# Altium PCB dtb-218-AW1.PcbDoc
Units mil, origin at the board's own origin, x right, y up, seen from the top; angles counter-clockwise.
Board outline 1240 x 3940 mil, 4 copper layers (Top Layer, GND Plane, 3.3V Plane, Bottom Layer), stack 61.2 mil thick; 21 components, 32 nets, 133 pads, 37 vias.
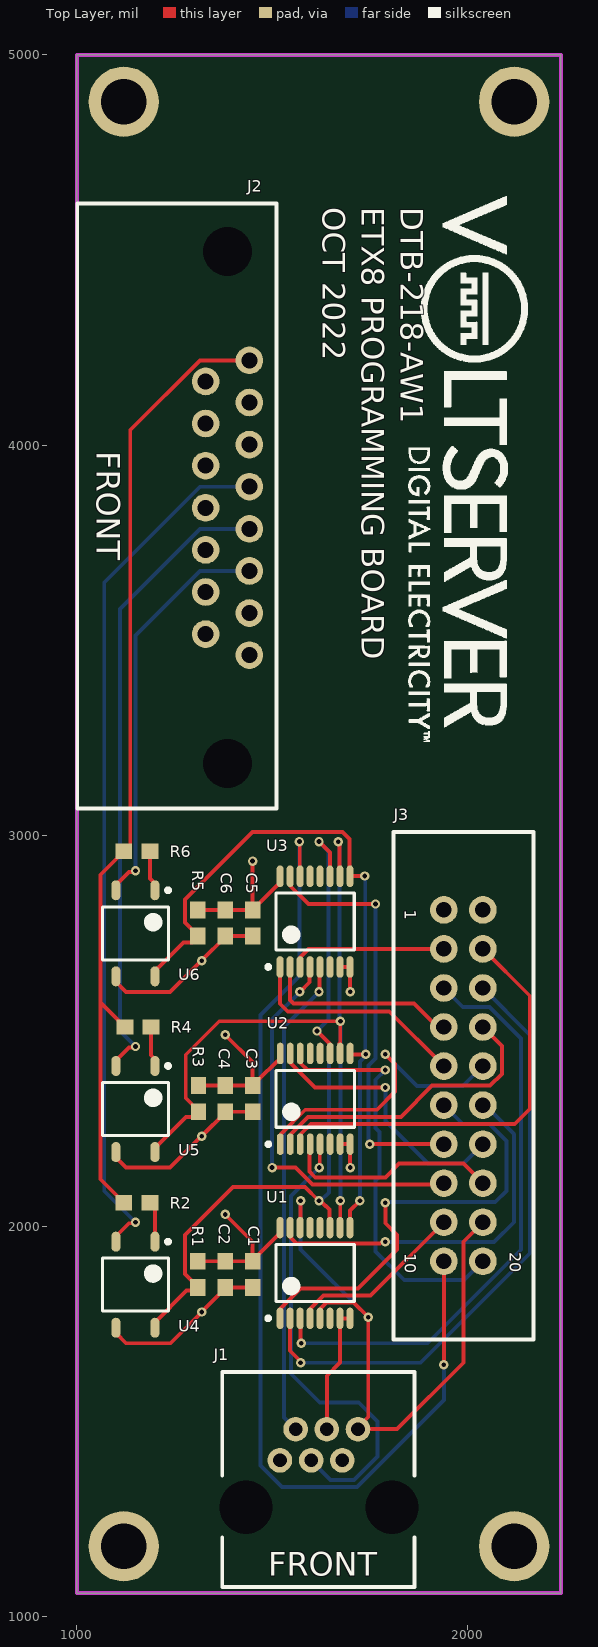
[diagram p0: Top Layer view]
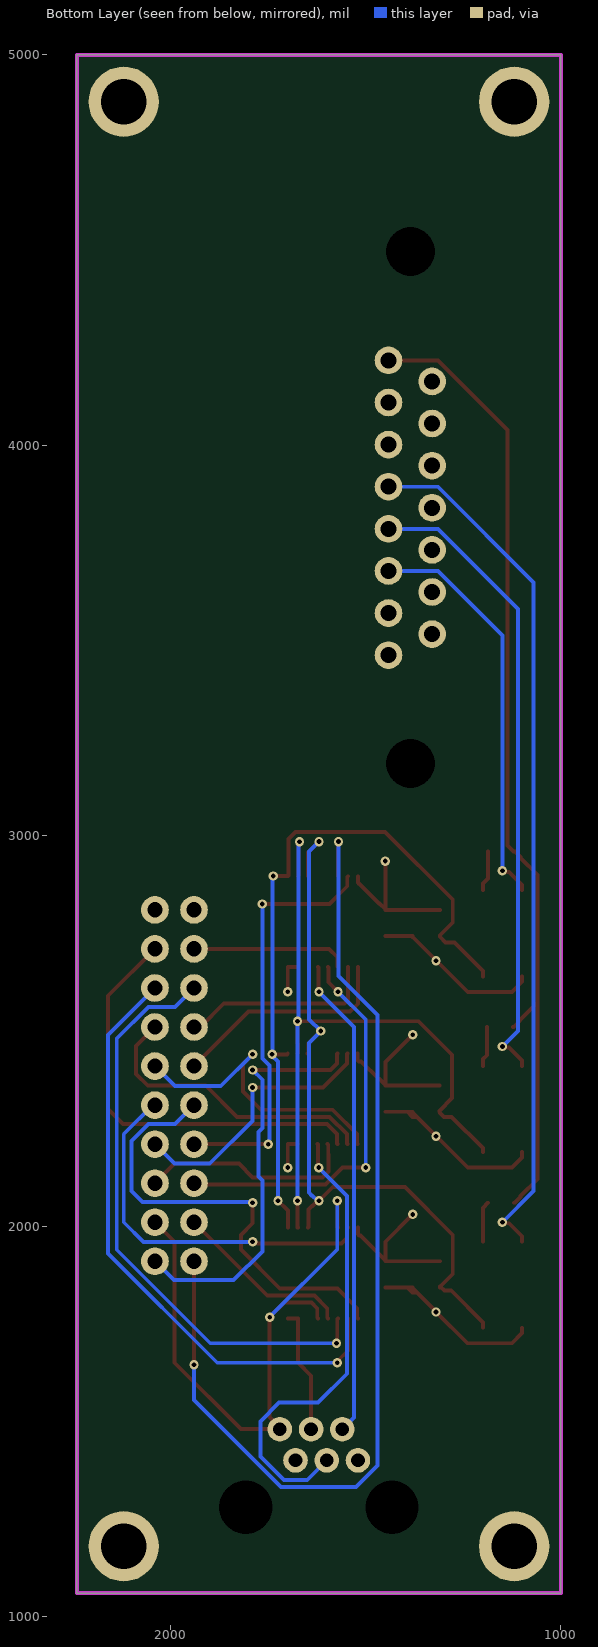
[diagram p1: Bottom Layer view, seen from below]
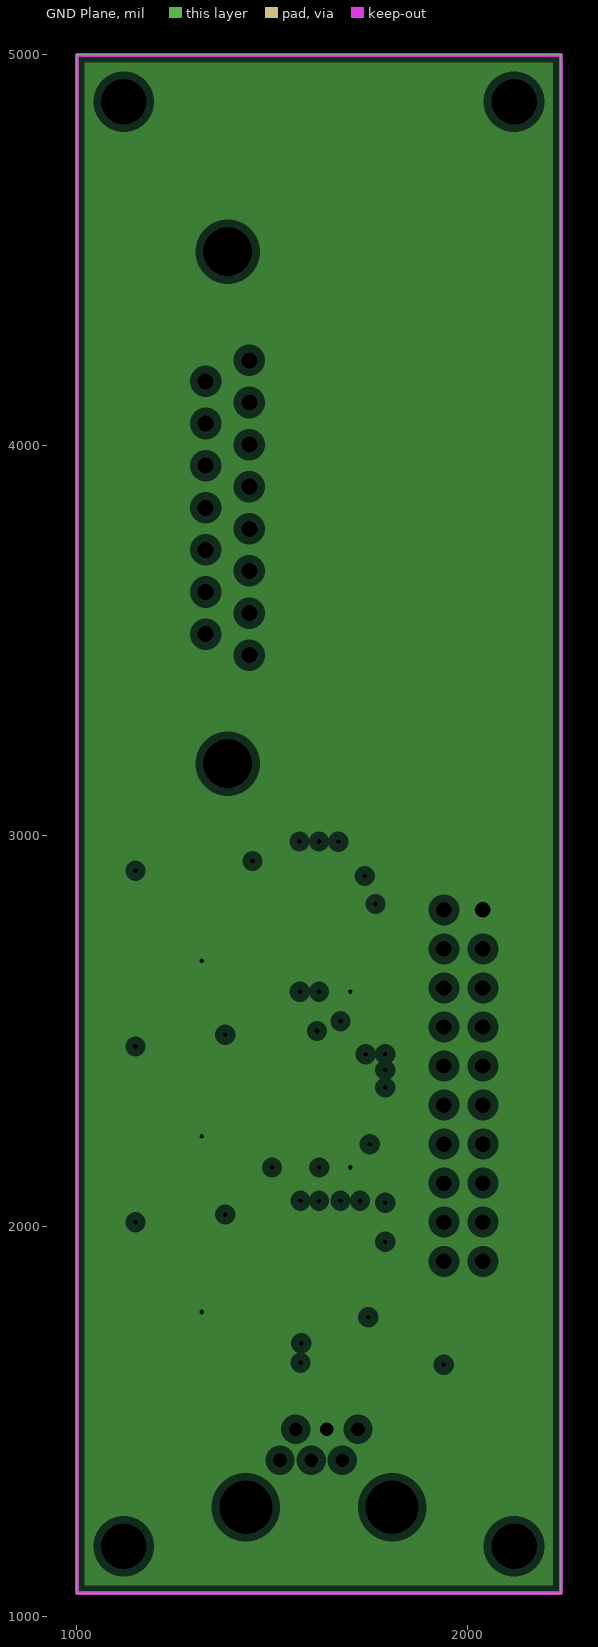
[diagram p2: GND Plane, clearances drawn from the general rule]
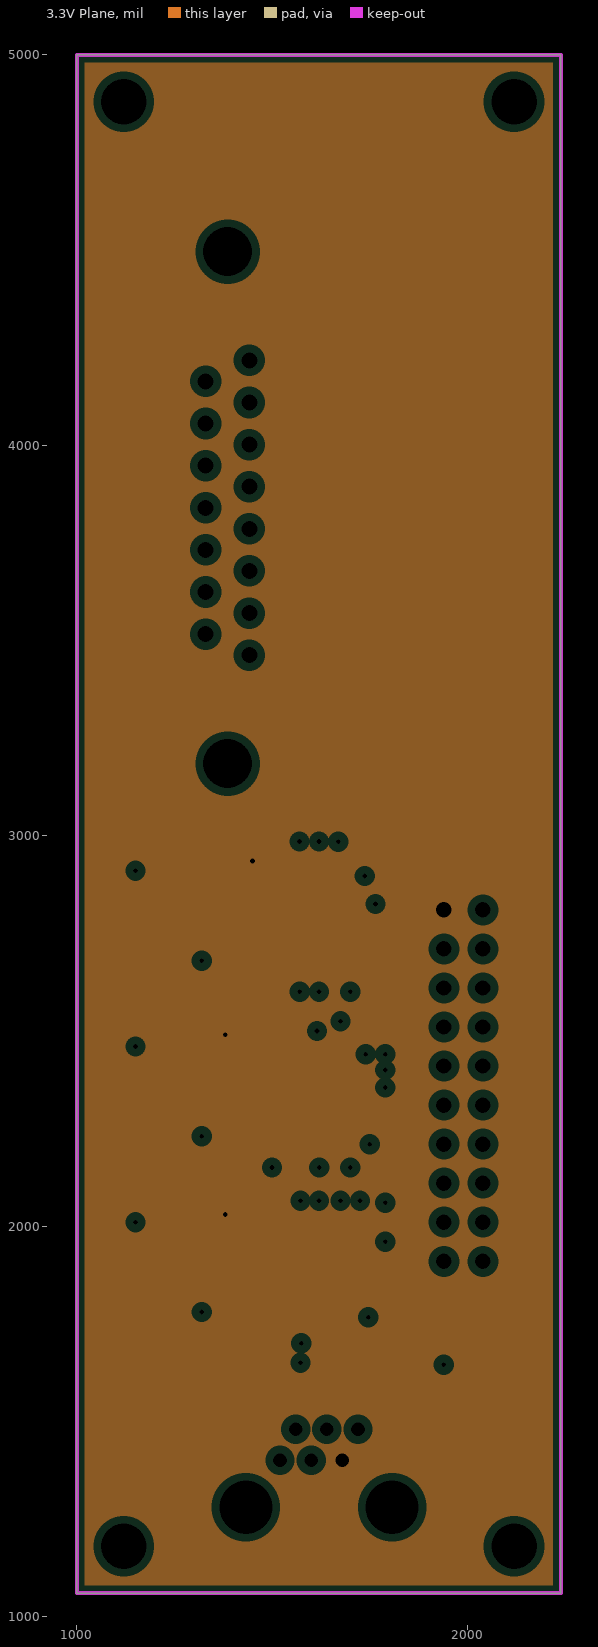
[diagram p3: 3.3V Plane, clearances drawn from the general rule]

## Layer stack, top to bottom
Top Solder: solder mask 0.4, Solder Resist, Dk 3.5
Top Layer: signal copper 1.4
Dielectric 1: core 10, FR-4, Dk 4.2
GND Plane: plane copper 1.4, net GND
Dielectric 3: prepreg 35.6, Dk 4.2
3.3V Plane: plane copper 1.4, net 3.3V
Dielectric 2: core 10, Dk 4.2
Bottom Layer: signal copper 1.4
Bottom Solder: solder mask 0.4, Solder Resist, Dk 3.5

## Board outline
1000,1060 1000,5000 2240,5000 2240,1060

## Design rules (kind name [scope] priority, off if disabled: settings)
Clearance "Clearance Exceptions" [InComponentClass('Clearance Exceptions') vs InComponentClass('Clearance Exceptions')] p1: gap=2 ignorepadtopadclearanceinfootprint=FALSE
Clearance [All] p2: gap=8 ignorepadtopadclearanceinfootprint=FALSE
Height [All] p1: minheight=0 maxheight=5000 prefheight=500
HoleSize [All] p1: absolutevalues=TRUE maxlimit=2000 minlimit=10 maxpercent=80.000 minpercent=20.000
MinimumSolderMaskSliver [All] p1: minsoldermaskwidth=2
PlaneClearance [All] p1: clearance=20
PlaneConnect [All] p1: planeconnectstyle=Relief reliefexpansion=20 reliefentries=4 reliefconductorwidth=10 reliefairgap=10
PolygonConnect [All] p1: connectstyle=Relief reliefconductorwidth=10 reliefentries=4 polygonreliefangle="90 Angle" airgapwidth=10
RoutingVias [All] p1: holewidth=12 width=24 viastyle="Through Hole" minholewidth=12 minwidth=22 maxholewidth=28 maxwidth=50
SilkToSilkClearance [All] p1: silktosilkclearance=1
SolderMaskExpansion [All] p1: expansion=4 istentingtop=FALSE
Width [All] p1: maxlimit=10 minlimit=10 preferedwidth=10
24 further rules are at their usual default settings.

## Classes and differential pairs
component class "TX DSP A": C1 C2 C3 C4 C5 C6 R2 R4 R6
component class "Clearance Exceptions": U1 U2 U3

## Components (designator, comment, footprint, x,y, rotation, side; value= is the part's Value field where it differs from the comment)
C1 "CL10B104KA8NNNC" "Standard VoltServer 0603 Capacitor Footprint" 1450,1876.54 r90 top value="0.1uF 25V"
C2 "CL10B105KA8NNNC" "Standard VoltServer 0603 Capacitor Footprint" 1380,1876.54 r90 top value="1uF 25V"
C3 "CL10B104KA8NNNC" "Standard VoltServer 0603 Capacitor Footprint" 1450,2326.54 r90 top value="0.1uF 25V"
C4 "CL10B105KA8NNNC" "Standard VoltServer 0603 Capacitor Footprint" 1380,2326.54 r90 top value="1uF 25V"
C5 "CL10B104KA8NNNC" "Standard VoltServer 0603 Capacitor Footprint" 1450,2776.54 r90 top value="0.1uF 25V"
C6 "CL10B105KA8NNNC" "Standard VoltServer 0603 Capacitor Footprint" 1380,2776.54 r90 top value="1uF 25V"
J1 "RJE0166001" RJE0166001 1520.08,1400 r0 top
J2 "5747841-4" 5747841-4 1385.91,3184.49 r90 top
J3 "302-S201" 302-S201 1940,2810 r270 top
R1 "RC1608J472CS" "Standard VoltServer 0603 Resistor Footprint" 1310,1876.54 r270 top value="4.7k, 5%"
R2 "RC1608J271CS" "Standard VoltServer 0603 Resistor Footprint" 1153.46,2060 r0 top value="270 Ohm 5%"
R3 "RC1608J472CS" "Standard VoltServer 0603 Resistor Footprint" 1311.54,2326.54 r270 top value="4.7k, 5%"
R4 "RC1608J271CS" "Standard VoltServer 0603 Resistor Footprint" 1156.54,2510 r0 top value="270 Ohm 5%"
R5 "RC1608J472CS" "Standard VoltServer 0603 Resistor Footprint" 1310,2776.54 r270 top value="4.7k, 5%"
R6 "RC1608J271CS" "Standard VoltServer 0603 Resistor Footprint" 1153.46,2960 r0 top value="270 Ohm 5%"
U1 "SN74CBT3251PWR" SN74CBT3251PWR 1610,1880 r90 top
U2 "SN74CBT3251PWR" SN74CBT3251PWR 1610.43,2326.14 r90 top
U3 "SN74CBT3251PWR" SN74CBT3251PWR 1610,2780 r90 top
U4 "CPC1002NTR" CPC1002NTR 1150,1850 r270 top
U5 "CPC1002NTR" CPC1002NTR 1150,2300 r270 top
U6 "CPC1002NTR" CPC1002NTR 1150,2750 r270 top

## Footprints (in the part's own frame and the unit in brackets; to place one, negate y for a bottom-side part, rotate by r counter-clockwise, add the part's x,y. Pads: shape width x height; smd on the part's side, far side on the other; paste and mask are expansions set on the pad)
302-S201 [mm]
  round 1.8 hole 1: 1(0,0) 2(2.54,0) 3(5.08,0) 4(7.62,0) 5(10.16,0) 6(12.7,0) 7(15.24,0) 8(17.78,0) 9(20.32,0) 10(22.86,0) 11(0,2.54) 12(2.54,2.54) 13(5.08,2.54) 14(7.62,2.54) 15(10.16,2.54) 16(12.7,2.54) 17(15.24,2.54) 18(17.78,2.54) 19(20.32,2.54) 20(22.86,2.54)
  silkscreen extent -5.08,-3.28 27.94,5.82, body extent -5.07,-3.11 27.93,5.74, height 9.13
5747841-4 [mm]
  round 0 hole 3.18 unplated: 0(0,0) 0(33.32,0)
  round 1.8 hole 1.04: 1(26.24,-1.42) 2(23.5,-1.42) 3(20.76,-1.42) 4(18.02,-1.42) 5(15.28,-1.42) 6(12.54,-1.42) 7(9.8,-1.42) 8(7.06,-1.42) 9(24.87,1.42) 10(22.13,1.42) 11(19.39,1.42) 12(16.65,1.42) 13(13.91,1.42) 14(11.17,1.42) 15(8.43,1.42)
  silkscreen extent -2.92,-3.17 36.45,9.78, body extent -2.92,-3.24 36.45,15.37, height 12.27
CPC1002NTR [mm] "RELAY OPTOMOS 700MA 4-SOP"
  oval 1.3x0.6 smd: 1(-2.8,1.27) 2(-2.8,-1.27) 3(2.8,-1.27) 4(2.8,1.27)
  silkscreen extent -2.92,-2.15 1.73,2.25, body extent -1.95,-2.15 1.95,2.15, height 2.19
RJE0166001 [mm]
  round 0 hole 3.45 unplated: 0(-2.22,-3.05) 0(7.3,-3.05)
  round 1.6 hole 0.89: 1(5.08,2.03) 2(4.06,0) 3(3.05,2.03) 4(2.03,0) 5(1.02,2.03) 6(0,0)
  silkscreen extent -3.75,-8.25 8.75,5.75, body extent -3.64,-10.77 8.64,5.77, height 12.85
SN74CBT3251PWR [mm] "TSOP, 16-Leads, Body 5.00x4.40mm, Pitch 0.65mm, IPC Medium Density"
  oval 1.4x0.45 smd: 1(-2.95,2.275) 2(-2.95,1.625) 3(-2.95,0.975) 4(-2.95,0.325) 5(-2.95,-0.325) 6(-2.95,-0.975) 7(-2.95,-1.625) 8(-2.95,-2.275) 9(2.95,-2.275) 10(2.95,-1.625) 11(2.95,-0.975) 12(2.95,-0.325) 13(2.95,0.325) 14(2.95,0.975) 15(2.95,1.625) 16(2.95,2.275)
  silkscreen extent -3.07,-2.55 1.85,3.17, body extent -2.25,-2.55 2.25,2.55, height 1.2
"Standard VoltServer 0603 Capacitor Footprint" [mm] "Chip Capacitor; Body 1.6 x 0.8 mm (LxW typ)"
  rect 1.1x1 smd: 1(-0.85,0) 2(0.85,0)
  body extent -0.85,-0.45 0.85,0.45, height 0.9
"Standard VoltServer 0603 Resistor Footprint" [mm] "Chip Resistor; Body 1.6 x 0.8 mm (LxW typ)"
  rect 1.1x1 smd: 1(-0.85,0) 2(0.85,0)
  body extent -0.85,-0.45 0.85,0.45, height 0.55

## Part data
C1 C3 C5: "CAP CER 0.1UF 25V 10% X7R 0603", Manufacturer=Samsung, ClassName="TX DSP A", Manufacturer PN=CL10B104KA8NNNC, Vendor=Digikey, Vendor PN=1276-1006-1-ND
C2 C4 C6: "CAP CER 1UF 25V 10% X7R 0603", Manufacturer=Samsung, ClassName="TX DSP A", Manufacturer PN=CL10B105KA8NNNC, Vendor=Digikey, Vendor PN=1276-1184-1-ND
J1: "CONN MOD JACK 6P6C R/A UNSHLD", Manufacturer=Amphenol, Manufacturer PN=RJE0166001, Vendor=Digikey, Vendor PN=RJE0166001-ND
J2: "CONN D-SUB PLUG 15POS R/A SOLDER", Manufacturer="TE Connectivity", Manufacturer PN=5747841-4, Vendor=Digikey, Vendor PN=A32096-ND
J3: "20 Positions Header, Shrouded Connector 0.100\"", Manufacturer="On Shore Technology", Manufacturer PN=302-S201, Vendor=Digikey, Vendor PN=ED10524-ND
R1 R3 R5: library part RC1608F105CS, "RES SMD 4.7K OHM 5% 1/10W 0603", Manufacturer=Samsung, Manufacturer PN=RC1608J472CS, Vendor=Digikey, Vendor PN=1276-5078-6-ND
R2 R4 R6: "RES SMD 270 OHM 5% 1/10W 0603", Manufacturer=Samsung, ClassName="TX DSP A", Manufacturer PN=RC1608J271CS, Vendor=Digikey, Vendor PN=1276-5048-1-ND
U1 U2 U3: "IC 1-OF-8 FET MUX/DEMUX 16-TSSOP", Manufacturer="Texas Instruments", ClassName="Clearance Exceptions", Manufacturer PN=SN74CBT3251PWR, Vendor=Digikey, Vendor PN=296-6431-1-ND
U4 U5 U6: "RELAY OPTOMOS 700MA 4-SOP", Manufacturer="IXYS Integrated Circuits Division", Manufacturer PN=CPC1002NTR, Vendor=Digikey, Vendor PN=CLA230CT-ND

## Free pads (board coordinates)
  round 180 hole 116: ""(1120,1180) ""(1120,4880) ""(2120,1180) ""(2120,4880)

## Via types
v1: diameter 24, hole 12, Top Layer to Bottom Layer, 37 vias

## Nets (pads, with @x,y where several pads share a name; then routed paths per layer and width w, separated by ;. In a path a pad name is that pad's centre, name@x,y a point inside that pad or via, vN(x,y) a via of type N, cw(c..) or ccw(c..) an arc to the next point about the centre after c; other vN are vias at no path point)
3.3V: C1.2 C2.2 C3.2 C4.2 C5.2 C6.2 J1.2 J3.1 R1.1 R3.1 R5.1 U1.16 U2.16 U3.16 | length 1195.4
  Top Layer w10: R1.1 C2.2 C1.2 1450,1960 v1(1380,2030) ; R5.1 C6.2 C5.2 C5.2@1450,2811.97 ; R3.1 C4.2 C3.2 1450,2420 v1(1380,2490) ; C1.2@1450,1911.97 1514,1975.96 1516.87,1975.96 1520.43,1979.53 U1.16 ; C3.2@1450,2361.97 1464.69,2376.65 1466.65,2376.65 1512.11,2422.11 1517.3,2422.11 1520.87,2425.67 U2.16 ; v1(1450,2935) C5.2@1450,2811.97 ; U3.16 1520.43,2879.53 1516.87,2875.96 1515.96,2875.96 1466.65,2826.65 1464.69,2826.65 C5.2@1450,2811.97
3.3V_LJ: J2.1 R2.1 R4.1 R6.1 | length 2508.4
  Top Layer w10: R2.1 1118.03,2060 1103.35,2074.69 1103.35,2076.65 1060,2120 1060,2573.07 ; R4.1 1121.1,2510 1106.42,2524.69 1106.42,2526.65 1060,2573.07 ; J2.1 1315.44,4217.56 1136.65,4038.77 1136.65,2974.69 1121.97,2960 R6.1 1118.03,2960 1103.35,2945.31 1103.35,2943.35 1060,2900 1060,2573.07
GND: C1.1 C2.1 C3.1 C4.1 C5.1 C6.1 J1.3 J3.11 U1.7 U1.8 U2.7 U2.8 U3.7 U3.8 U4.3 U5.3 U6.3 | length 2020.5
  Top Layer w10: U4.3 1100,1725.98 1125.98,1700 1240,1700 v1(1320,1780) 1320,1781.1 C2.1@1368.9,1830 ; U5.3 1100,2175.98 1125.98,2150 1238.9,2150 1319.45,2230.55 1380,2291.1 C4.1 C4.1@1393.07,2293.07 ; U6.3 1100,2625.98 1125.98,2600 1238.9,2600 1319.45,2680.55 1380,2741.1 C6.1 ; v1(1320,2230) 1320,2231.1 1368.9,2280 1380,2280 C4.1@1393.07,2293.07 ; v1(1320,2680) 1320,2681.1 1378.9,2740 1380,2740 1383.07,2743.07 C5.1 ; C1.1 1433.07,1843.07 C2.1@1393.07,1843.07 ; C3.1 1443.07,2293.07 C4.1@1393.07,2293.07 ; J1.3 1640.16,1616.76 1673.98,1650.57 U1.7 U1.8 ; U3.7 U3.8 1699.78,2663.64 1699.78,2600.22 v1(1700,2600) ; U2.7 U2.8 v1(1700,2150) ; C2.1@1368.9,1830 1380,1841.1 C2.1 C2.1@1393.07,1843.07 ; C2.1@1368.9,1830 1380,1830 C2.1@1393.07,1843.07
LJ_EIO0: J2.4 U4.2 | length 2223.8
  Top Layer w10: U4.2 1100,1974.02 1133.31,2007.32 1147.32,2007.32 v1(1150,2010)
  Bottom Layer w10: v1(1150,2010) 1070,2090 1070,3648.49 1315.44,3893.94 J2.4
LJ_EIO2: J2.5 U5.2 | length 1632.8
  Top Layer w10: U5.2 1100,2424.02 1133.31,2457.32 1147.32,2457.32 v1(1150,2460)
  Bottom Layer w10: v1(1150,2460) 1110,2500 1110,3580.62 1315.44,3786.06 J2.5
LJ_EIO4: J2.6 U6.2 | length 1041.8
  Top Layer w10: U6.2 1100,2874.02 1133.31,2907.32 1147.32,2907.32 v1(1150,2910)
  Bottom Layer w10: v1(1150,2910) 1150,3512.75 1315.44,3678.19 J2.6
NetJ1_1: J1.1 J3.19 U1.5 U1.14 | length 1628.1
  Top Layer w10: U1.14 1572.31,1996.83 1572.31,2064.31 v1(1573,2065) ; U1.5 1624.27,1765.33 1624.27,1789.36 1639.33,1804.42 1708.62,1804.42 v1(1746.25,1766.78) 1746.25,1511.22 1720.08,1485.04 J1.1 1819.92,1479.92 1990,1650 1990,1960 J3.19
  Bottom Layer w10: v1(1573,2065) 1573,1940.04 v1(1746.25,1766.78)
NetJ1_4: J1.4 U2.5 | length 1197.3
  Top Layer w10: v1(1620.83,2150) 1622.03,2151.2 1622.03,2208.8 U2.5
  Bottom Layer w10: J1.4 1650,1350 1710,1350 1770,1410 1770,1500 1722.06,1547.94 1622.06,1547.94 1548,1622 1548,2077.17 v1(1620.83,2150)
NetJ1_5: J1.5 U3.5 | length 1234.9
  Top Layer w10: v1(1620,2600) 1621.4,2601.4 1621.4,2662.46 U3.5
  Bottom Layer w10: J1.5 1530,1510.16 1530,2510 v1(1620,2600)
NetJ3_2: J3.2 U3.3 | length 401.6
  Top Layer w10: U3.3 1573.09,2665.33 1573.09,2689.36 1593.73,2710 J3.2
NetJ3_3: J3.3 U1.3 | length 1520.1
  Top Layer w10: U1.3 1573.09,1762.38 1573.09,1701.91 v1(1575,1700)
  Bottom Layer w10: v1(1575,1700) 1898.49,1700 2138,1939.51 2138,2480.49 2056.93,2561.57 1988.43,2561.57 J3.3
NetJ3_4: J3.4 U3.2 | length 507.4
  Top Layer w10: U3.2 1546.02,2578.98 1555,2570 1863.71,2570 1923.71,2510 J3.4
NetJ3_5: J3.5 U3.1 | length 580
  Top Layer w10: U3.1 1520.43,2569.57 1540,2550 1800,2550 J3.5
NetJ3_6: J3.6 U1.1 | length 1167.8
  Top Layer w10: U1.1 1521.91,1765.33 1521.91,1789.36 1572.55,1840 1623.87,1840 1624.29,1840.42 1720.42,1840.42 1820,1940 1820,1977.35 1790,2007.35 v1(1790,2060)
  Bottom Layer w10: v1(1790,2060) 1791.57,2061.57 2071.57,2061.57 2100,2090 2100,2218.49 2056.93,2261.57 1988.43,2261.57 J3.6
NetJ3_7: J3.7 U3.15 | length 1076.2
  Top Layer w10: U3.15 1547.5,2894.67 1547.5,2870.64 1593.14,2825 v1(1765,2825) ; v1(1750,2210) J3.7
  Bottom Layer w10: v1(1750,2210) 1747.32,2212.68 1747.32,2222.54 1747,2222.86 1747,2411.64 1765,2429.64 v1(1765,2825)
NetJ3_8: J3.8 U3.4 | length 1013.2
  Top Layer w10: v1(1500,2150) 1560,2150 1603,2107 1937,2107 J3.8 ; v1(1571.02,2600) 1595.73,2624.7 1595.73,2662.38 U3.4
  Bottom Layer w10: v1(1500,2150) 1500,2528.98 v1(1571.02,2600)
NetJ3_9: J3.9 U1.4 | length 458.8
  Top Layer w10: U1.4 1598.68,1765.33 1598.68,1789.36 1631.74,1822.42 1752.42,1822.42 J3.9
NetJ3_10: J3.10 U3.14 | length 2669.3
  Top Layer w10: v1(1570,2985) 1570.81,2984.19 1570.81,2896.95 U3.14 ; v1(1940,1645) J3.10
  Bottom Layer w10: v1(1570,2985) 1570,2640.36 1470,2540.36 1470,1387.15 1525.15,1332 1717.46,1332 1940,1554.54 v1(1940,1645)
NetJ3_12: J3.12 U2.3 | length 1099
  Top Layer w10: U2.3 1573.52,2211.48 1573.52,2235.5 1599.59,2261.57 2121.57,2261.57 2160,2300 2160,2590 J3.12
NetJ3_13: J3.13 U1.2 | length 1558
  Top Layer w10: U1.2 1546.02,1680.76 1573,1653.79 v1(1573,1650)
  Bottom Layer w10: v1(1573,1650) 1880.46,1650 2160,1929.54 2160,2490 J3.13
NetJ3_14: J3.14 U2.2 | length 770.7
  Top Layer w10: U2.2 1547.93,2211.48 1547.93,2235.5 1592.43,2280 1830,2280 1910,2360 2058.49,2360 2088.43,2389.94 2088.43,2461.57 J3.14
NetJ3_15: J3.15 U2.1 | length 774.8
  Top Layer w10: U2.1 1522.34,2211.48 1522.34,2235.5 1584.84,2298 1768.35,2298 1815,2344.64 1815,2415 v1(1790,2440)
  Bottom Layer w10: v1(1790,2440) 1871.57,2358.43 1988.43,2358.43 J3.15
NetJ3_16: J3.16 U1.15 | length 964.7
  Top Layer w10: U1.15 1547.5,1994.67 1547.5,1970.64 1562.56,1955.58 1777.14,1955.58 1778.88,1957.32 1787.32,1957.32 v1(1790,1960)
  Bottom Layer w10: v1(1790,1960) 1791.15,1958.85 2068.85,1958.85 2120,2010 2120,2235.46 2045.46,2310 J3.16
NetJ3_17: J3.17 U2.15 | length 695.3
  Top Layer w10: U2.15 1547.93,2440.81 1547.93,2416.78 1609.72,2355 v1(1790,2355)
  Bottom Layer w10: v1(1790,2355) 1790,2269.64 1899.64,2160 1990,2160 J3.17
NetJ3_18: J3.18 U2.4 | length 556.5
  Top Layer w10: U2.4 1596.16,2208.52 1596.16,2184.37 1595.83,2184.04 1595.83,2139.64 1610.48,2125 1790,2125 1825,2160 1990,2160 J3.18
NetJ3_20: J3.20 U2.14 | length 1058.7
  Top Layer w10: U2.14 1573.52,2440.81 1573.52,2416.78 1590.31,2400 v1(1790,2400)
  Bottom Layer w10: v1(1790,2400) 1765,2375 1765,2251.14 1775,2241.14 1775,2126.92 1765,2116.92 1765,1935 1838.43,1861.57 1991.57,1861.57 J3.20
NetR2_2: R2.2 U4.1 | length 105.2
  Top Layer w10: R2.2 1200,2046.93 U4.1
NetR4_2: R4.2 U5.1 | length 103.9
  Top Layer w10: R4.2 1190,2437.7 1200,2427.7 U5.1
NetR6_2: R6.2 U6.1 | length 105.2
  Top Layer w10: R6.2 1186.93,2890.77 1200,2877.7 U6.1
SEL0: R1.2 U1.11 U2.11 U3.11 U4.4 | length 1942
  Top Layer w10: U4.4 1200,1753.54 1281.17,1834.72 1298.18,1834.72 R1.2@1309.25,1845.79 ; R1.2 1310,1845.04 R1.2@1309.25,1845.79 ; v1(1615,2499.7) 1615.42,2499.7 1647.34,2467.78 1647.34,2443.76 U2.11 ; v1(1620,2985) 1648.39,2956.61 U3.11 ; U1.11 1646.91,1997.62 1646.91,2043.09 1638.06,2051.94 1636.84,2051.94 1623.79,2065 1619.54,2065 1584.54,2100 1400,2100 1277.31,1977.31 1277.31,1877.72 R1.2@1309.25,1845.79
  Bottom Layer w10: v1(1620,2065) 1623.79,2065 1637.55,2078.76 1638.76,2078.76 1645.83,2085.83 1645.83,2468.87 v1(1615,2499.7) 1645,2529.7 1645,2960 v1(1620,2985)
SEL1: R3.2 U1.10 U2.10 U3.10 U5.4 | length 1912.9
  Top Layer w10: U5.4 1200,2200 1280,2280 1300,2280 R3.2@1310,2290 ; R3.2 1311.54,2295.04 1278.85,2327.72 1278.85,2438.85 1364.7,2524.7 1674.7,2524.7 U2.10@1674.7,2467.78 ; v1(1669.82,2984.82) 1672.5,2982.14 1672.5,2897.62 U3.10 ; U2.10@1672.93,2467.78 1672.93,2443.76 U2.10 ; U1.10 1674.49,1996.65 1674.49,2064.49 v1(1675,2065)
  Bottom Layer w10: v1(1669.82,2984.82) 1672.41,2982.23 1672.41,2527.59 v1(1675,2525) v1(1675,2065)
SEL2: R5.2 U1.9 U2.9 U3.9 U6.4 | length 1863.3
  Top Layer w10: U6.4 1200,2653.54 1272.87,2726.42 1295.31,2726.42 1310,2741.1 R5.2 1310,2745.04 1277.31,2777.72 1277.31,2837.04 1450.28,3010 1680,3010 1698.09,2991.91 1698.09,2897.62 U3.9 1700.28,2896.86 v1(1737.16,2896.86) ; U1.9 1699.57,2039.57 v1(1725,2065) ; U2.9 1702.28,2440 v1(1740,2440)
  Bottom Layer w10: v1(1725,2065) 1725,2421.21 1740,2436.21 v1(1740,2440) 1738.58,2441.42 1738.58,2895.44 v1(1737.16,2896.86)
pads on no net: J1.0 J1.6 J2.0 J2.2 J2.3 J2.7 J2.8 J2.9 J2.10 J2.11 J2.12 J2.13 J2.14 J2.15 U1.6 U1.12 U1.13 U2.6 U2.12 U2.13 U3.6 U3.12 U3.13

## Polygon pours and split planes (outlines as drawn)
GND on GND Plane (split plane): 2219.9,1080.1 1020.1,1080.1 1020.1,4979.9 2219.9,4979.9
3.3V on 3.3V Plane (split plane): 2219.9,1080.1 1020.1,1080.1 1020.1,4979.9 2219.9,4979.9

## Keep-outs
Keep-Out Layer:
  the board outline again, w10

## Silkscreen, mask and mechanical layers (free items; w line width, h text height)
Top Overlay:
  drawing of 32 lines, arcs and shapes, not listed
  text "DTB-218-AW1 / ETX8 PROGRAMMING BOARD / OCT 2022" at 1610,4610 h100 r270
Mechanical 1:
  lines w10: 1000,1060 2240,1060 ; 1000,1060 1000,5000 ; 1000,1060 2240,1060 ; 1000,1060 1000,5000 ; 1000,5000 2240,5000 ; 1000,5000 2240,5000 ; 2240,1060 2240,5000 ; 2240,1060 2240,5000

## Text inside footprints (layer, text, board x,y; h text height)
J1: Top Overlay "FRONT" at 1490.55,1104.72 h60
J2: Top Overlay "FRONT" at 1050.91,3984.49 h60 r270
J3: Top Overlay "20" at 2108.9,1933.27 h30 r270; Top Overlay "10" at 1840,1930 h30 r270; Top Overlay "1" at 1840,2810 h30 r270